# EAGLE board ppgimp (EAGLE 9.3.1)
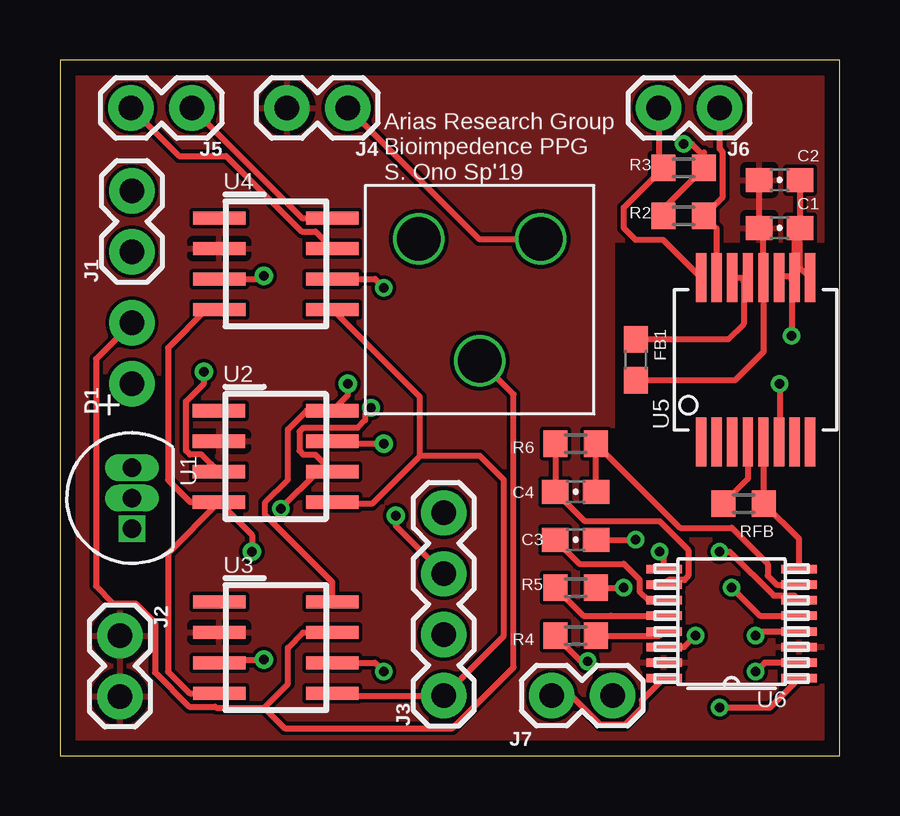
[diagram p0: board, top side]
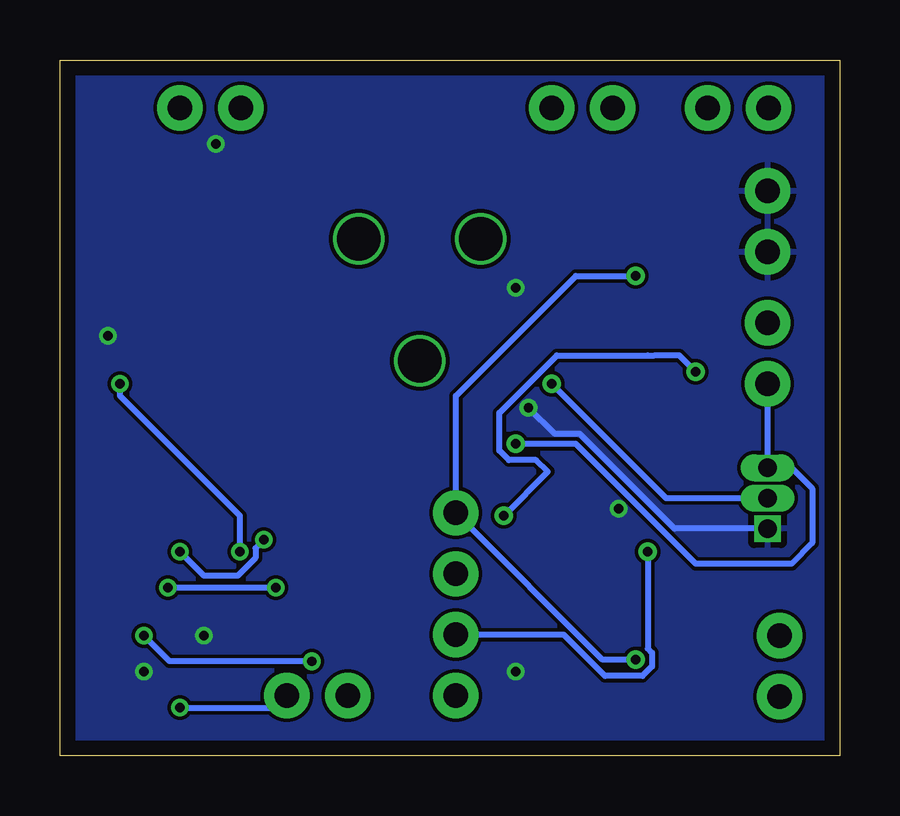
[diagram p1: board, bottom side, seen from below]

Size 32.5 x 29 mm. Coordinates in mm from the lower left corner, seen from the top.
Outline: 0,0 32.5,0 32.5,29 0,29 0,0
Copper layers (1*16): Top 2mil / dielectric 9mil / Bottom 2mil
Design rules "squishy *": minimum track width 6mil, minimum drill 15mil, track to track 6mil, track to pad 6mil, pad to pad 6mil, via to via 6mil, smd to smd 6mil, copper to edge 25mil, drill to drill 7mil, minimum pad ring 7mil, minimum via ring 7mil, stop-mask expansion 3mil, vias tented up to drill 0mil, thermal gap 10mil

## Footprints (pad centres in the part's own frame; a part is rotated, then mirrored left to right if it is on the bottom)
0603-CAP = smd 1.1 x 1: 1 -0.85,0; 2 0.85,0
DIODE_THRU = drill 1.016 pad 1.88: 1 0,0; 2 2.54,0
0603-FERR = smd 1.1 x 1: 1 -0.85,0; 2 0.85,0
1X02 = drill 1.016 pad 1.88: 1 0,0; 2 2.54,0
1X04 = drill 1.016 pad 1.88: 1 0,0; 2 2.54,0; 3 5.08,0; 4 7.62,0
POT-3PIN = drill 1.8: 1 2.54,-2.54; 2 0,2.54; 3 -2.54,-2.54
R0603 = smd 1 x 1.1: 1 -0.85,0; 2 0.85,0
Z03A = drill 0.762 pad 1 square: 1 -2.54,0 | drill 0.762 pad 1 long: 2 -1.27,0; 3 0,0
R_8 = smd 2.184 x 0.559: 1 -2.362,1.905; 2 -2.362,0.635; 3 -2.362,-0.635; 4 -2.362,-1.905; 5 2.362,-1.905; 6 2.362,-0.635; 7 2.362,0.635; 8 2.362,1.905
RS_16 = smd 2.057 x 0.432: 1 -3.429,2.275; 2 -3.429,1.625; 3 -3.429,0.975; 4 -3.429,0.325; 5 -3.429,-0.325; 6 -3.429,-0.975; 7 -3.429,-1.625; 8 -3.429,-2.275; 9 3.429,-2.275; 10 3.429,-1.625; 11 3.429,-0.975; 12 3.429,-0.325; 13 3.429,0.325; 14 3.429,0.975; 15 3.429,1.625; 16 3.429,2.275
RU_16 = smd 1.473 x 0.356: 1 -2.819,2.275; 2 -2.819,1.625; 3 -2.819,0.975; 4 -2.819,0.325; 5 -2.819,-0.325; 6 -2.819,-0.975; 7 -2.819,-1.625; 8 -2.819,-2.275; 9 2.819,-2.275; 10 2.819,-1.625; 11 2.819,-0.975; 12 2.819,-0.325; 13 2.819,0.325; 14 2.819,0.975; 15 2.819,1.625; 16 2.819,2.275

## Placement (x,y rotation side)
C1  0.1uF  [0603-CAP]  30,22 0 top
C2  10uF  [0603-CAP]  30,24 0 top
C3  1uF  [0603-CAP]  21.5,9 180 top
C4  1uF  [0603-CAP]  21.5,11 180 top
D1  1N457  [DIODE_THRU]  3,15.5 90 top
FB1  [0603-FERR]  24,16.5 270 top
J1  VDD  [1X02]  3,21 90 top
J2  GND  [1X02]  2.5,5 270 top
J3  SPI  [1X04]  16,2.5 90 top
J4  I_Test  [1X02]  12,27 180 top
J5  R_test  [1X02]  5.5,27 180 top
J6  SDA  [1X02]  27.5,27 180 top
J7  SEL  [1X02]  20.5,2.5 0 top
R1  [POT-3PIN]  17.5,19 180 top
R2  10K  [R0603]  26,22.5 180 top
R3  10K  [R0603]  26,24.5 0 top
R4  510K  [R0603]  21.5,5 180 top
R5  200K  [R0603]  21.5,7 0 top
R6  100K  [R0603]  21.5,13 180 top
RFB  1M  [R0603]  28.5,10.5 180 top
U1  LM334Z/NOPB  [Z03A]  3,12 90 top
U2  AD8400ARZ1  [R_8]  8.99,12.47 0 top
U3  AD8400ARZ10  [R_8]  9,4.5 0 top
U4  AD8400ARZ10  [R_8]  9,20.5 0 top
U5  AD5933YRSZ  [RS_16]  29,16.5 90 top
U6  ADG1609  [RU_16]  28,5.5 180 top

## Library data of the parts
C1-C4 = scono; PIE-INT-REF-NUM: CAPACITOR-GENERIC
D1 FB1 J1 J2 J4-J7 R1 = scono
J3 = scono; PROD_ID: CONN-09696
R2-R6 RFB = scono; DESCRIPTION: RESISTOR, American symbol; DISTRIBUTOR: DigiKey; MANUFACTURER: Rohm Semiconductor; NOTES: Cut Tape; PACKAGE: R0603
U1 = scono; MANUFACTURER_PART_NUMBER: LM334ZNOPB; VENDOR: Texas Instruments
U2 = scono; MANUFACTURER_PART_NUMBER: AD8400ARZ1; VENDOR: Analog Devices Inc
U3 U4 = scono; MANUFACTURER_PART_NUMBER: AD8400ARZ10; VENDOR: Analog Devices Inc
U5 = scono; MANUFACTURER_PART_NUMBER: AD5933YRSZ; VENDOR: Analog Devices Inc
U6 = scono; MANUFACTURER_PART_NUMBER: ADG1609BRUZ; VENDOR: Analog Devices Inc

## Nets
1KCS: J3.3 U2.3
10KCS: J3.4 U3.3 U4.3
A1: J5.1 U4.8
AGND: FB1.1 U5.13 U5.14
GND: C1.1 C2.1 FB1.2 J2.1 J2.2 J4.2 U2.2 U3.2 U4.2 U5.12 U6.3 U6.15
I_OUT: D1.2 R1.2 U3.7
MOSI: J3.2 U2.4 U3.4 U4.4
N$1: J4.1 R1.3
N$2: RFB.2 U5.4
N$3: J7.1 U6.16
N$4: J7.2 U6.1
N$5: R4.2 U6.4
N$6: R4.1 U6.13
N$7: R5.2 U6.5
N$8: R5.1 U6.12
N$9: C3.1 U6.6
N$10: C3.2 U6.11
N$11: C4.1 R6.1 U6.7
N$12: C4.2 R6.2 U6.10
R: U1.2 U2.8 U3.8
SCL: J6.2 R3.1 U5.16
SCLK: J3.1 U2.5 U3.5 U4.5
SDA: J6.1 R2.1 U5.15
V-: D1.1 U1.3 U2.7
VDD: C1.2 C2.2 J1.1 J1.2 R2.2 R3.2 U1.1 U2.6 U3.6 U4.6 U5.9 U5.10 U5.11 U6.2 U6.14
VIN: RFB.1 U5.5 U6.8
VOUT: U5.6 U6.9
W1: J5.2 U4.7

## Tracks (layer width: path | path; a pad name or v marks a point on that pad's centre or on a via)
1KCS  (via drill 0.4)
  Top 0.254: J3.3 14,9.58 v14,10 | U2.3 5.92,12.55 5.42,12.55 5.26,12.71 5.26,14.77 6,15.51 v6,16
  Bottom 0.254: v14,10 12.16,11.84 12.65,12.32 13.78,12.32 14.18,12.72 14.18,14.28 11.78,16.68 8,16.68 7.72,16.68 6.68,16.68 v6,16
10KCS  (via drill 0.4)
  Top 0.254: U3.3 6.77,4 v8.5,4 | U4.3 8.37,19.86 v8.5,20
  Bottom 0.254: v8.5,4 9.88,4 J3.4 16,15 11,20 v8.5,20
A1
  Top 0.254: J5.1 10.1,22.41 U4.8
AGND
  Top 0.254: U5.14 U5.13 28.5,19.75 28.5,18 27.85,17.35 FB1.1
GND
  Top 0.254: C2.1 C1.1 29.32,21.82 U5.12 29.32,16.82 28.15,15.65 FB1.2
  pour Top: 0.5,28.5 32,28.5 32,21.5 23,21.5 23,9 32,9 32,0.5 0.5,0.5
I_OUT
  Top 0.254: 8.5,2 6.5,2 6.46,2.04 5.39,2.04 3.96,3.46 3.96,5.54 3.16,6.34 2.23,6.34 1.5,7.07 1.5,16.54 D1.2 | 8.5,2 9.5,3 9.5,4.5 10.13,5.13 U3.7 | 8.5,2 9.36,1.14 16.37,1.14 18.91,3.68 18.91,15.05 R1.2
MOSI  (via drill 0.4)
  Top 0.254: U2.4 4.5,8.44 4.5,3.5 5.41,2.6 U3.4 | U2.4 5.43,10.56 4.5,11.5 4.5,17 6.09,18.59 U4.4 | U2.4 8,9.19 v8,8.5
  Bottom 0.254: J3.2 11.49,5.04 9.77,3.32 8.22,3.32 7.82,3.72 7.82,4.28 8,4.46 v8,8.5
N$1
  Top 0.254: J4.1 17.46,21.54 R1.3
N$2
  Top 0.254: U5.4 28.68,11.53 RFB.2
N$3
  Top 0.254: J7.1 21.32,2.5 22.54,1.28 23.55,1.28 24.26,2 24.26,2.3 U6.16
N$4  (via drill 0.38)
  Top 0.254: U6.1 29.59,2 v27.5,2
  Bottom 0.254: v27.5,2 23.54,2 J7.2
N$5  (via drill 0.38)
  Top 0.254: R4.2 21.72,3.93 v22,3.93 | v29,5 29.18,5.17 U6.4
  Bottom 0.254: v22,3.93 27.93,3.93 v29,5
N$6
  Top 0.254: R4.1 25.01,5 U6.13
N$7  (via drill 0.38)
  Top 0.254: R5.2 v23.5,7 | v28,7 29.18,5.83 U6.5
  Bottom 0.254: v23.5,7 v28,7
N$8
  Top 0.254: R5.1 21.82,5.83 22.97,5.83 U6.12
N$9  (via drill 0.38)
  Top 0.254: C3.1 v24,9 | U6.6 30.63,6.67 29.76,6.67 27.93,8.5 v27.5,8.5
  Bottom 0.254: v24,9 24.35,8.65 24.35,8.23 25.08,7.5 26.5,7.5 v27.5,8.5
N$10
  Top 0.254: C3.2 21.65,8 23.5,8 24.16,7.33 24.16,6.83 24.52,6.47 U6.11
N$11
  Top 0.254: C4.1 R6.1 25.85,9.5 28,9.5 29.5,8 29.5,7.5 29.88,7.12 U6.7
N$12
  Top 0.254: R6.2 C4.2 21.87,9.78 25,9.78 26.2,8.58 26.2,7.48 26.03,7.32 25.37,7.32 U6.10
R  (via drill 0.4)
  Top 0.254: v12,15.5 12,15.02 U2.8 10.28,14.38 9.5,13.59 9.5,11.5 8.56,10.56 8.56,10.02 11.36,7.22 U3.8
  Bottom 0.254: v12,15.5 7.23,10.73 U1.2
SCL
  Top 0.254: U5.16 25.15,21.5 24,21.5 23.5,22 23.5,22.85 R3.1 24.96,24.69 J6.2
SCLK
  Top 0.254: U3.5 11.46,2.5 J3.1 18.5,5 18.5,11.5 17.5,12.5 15,12.5 | 15,12.5 13,10.5 11.42,10.5 U2.5 | 15,12.5 15,14.96 U4.5
SDA
  Top 0.254: U5.15 27.38,21.98 R2.1 27.63,23.28 27.63,25.17 27.5,25.3 J6.1
V-  (via drill 0.4)
  Top 0.254: v13.5,13 11.46,13 U2.7
  Bottom 0.254: v13.5,13 11,13 6,8 2,8 1.14,8.86 1.14,11.14 2,12 U1.3 D1.1
VDD  (via drill 0.38)
  Top 0.254: U4.6 13.13,19.86 v13.5,19.5 | v9.21,10.29 10.75,11.84 U2.6 10.64,12.55 10.14,12.55 9.98,12.71 9.98,13.5 10.14,13.66 12.41,13.66 12.72,13.98 12.72,14.26 v12.96,14.5 | U3.6 13.13,3.87 v13.5,3.5 | R2.2 25.15,22.8 R3.2 | R3.2 26.5,24.85 | C2.2 C1.2 | 30.62,20 U5.10 30.5,19.8 v30.5,17.5 | 30.62,20 30.62,21.77 C1.2 | U5.9 30.85,20.35 C1.2 | U5.11 30.05,20 30.62,20 | R3.2 26.85,25 | 26.85,25 26.85,25.15 | U6.14 26.02,4.53 v26.5,5 | U6.2 29.38,3.88 v29,3.5 | 26.85,25 26.35,25.5 v26,25.5
  Bottom 0.254: v12.96,14.5 11.87,13.41 10.83,13.41 6.88,9.46 U1.1
  pour Bottom: 0.5,28.5 32,28.5 32,0.5 0.5,0.5
VIN
  Top 0.254: U5.5 29.35,13.05 RFB.1 30.82,9.03 U6.8
VOUT  (via drill 0.38)
  Top 0.254: U6.9 25.18,8.32 v25,8.5 | v30,15.5 30,13.1 U5.6
  Bottom 0.254: v25,8.5 25,10 30,15 v30,15.5
W1
  Top 0.254: J5.2 4.96,25 6.92,25 10.08,21.85 10.65,21.85 U4.7

## Text on the board
tPlace: Arias Research Group / Bioimpedence PPG / S. Ono Sp'19